# EAGLE board thermocouple-iron (EAGLE 5.07)
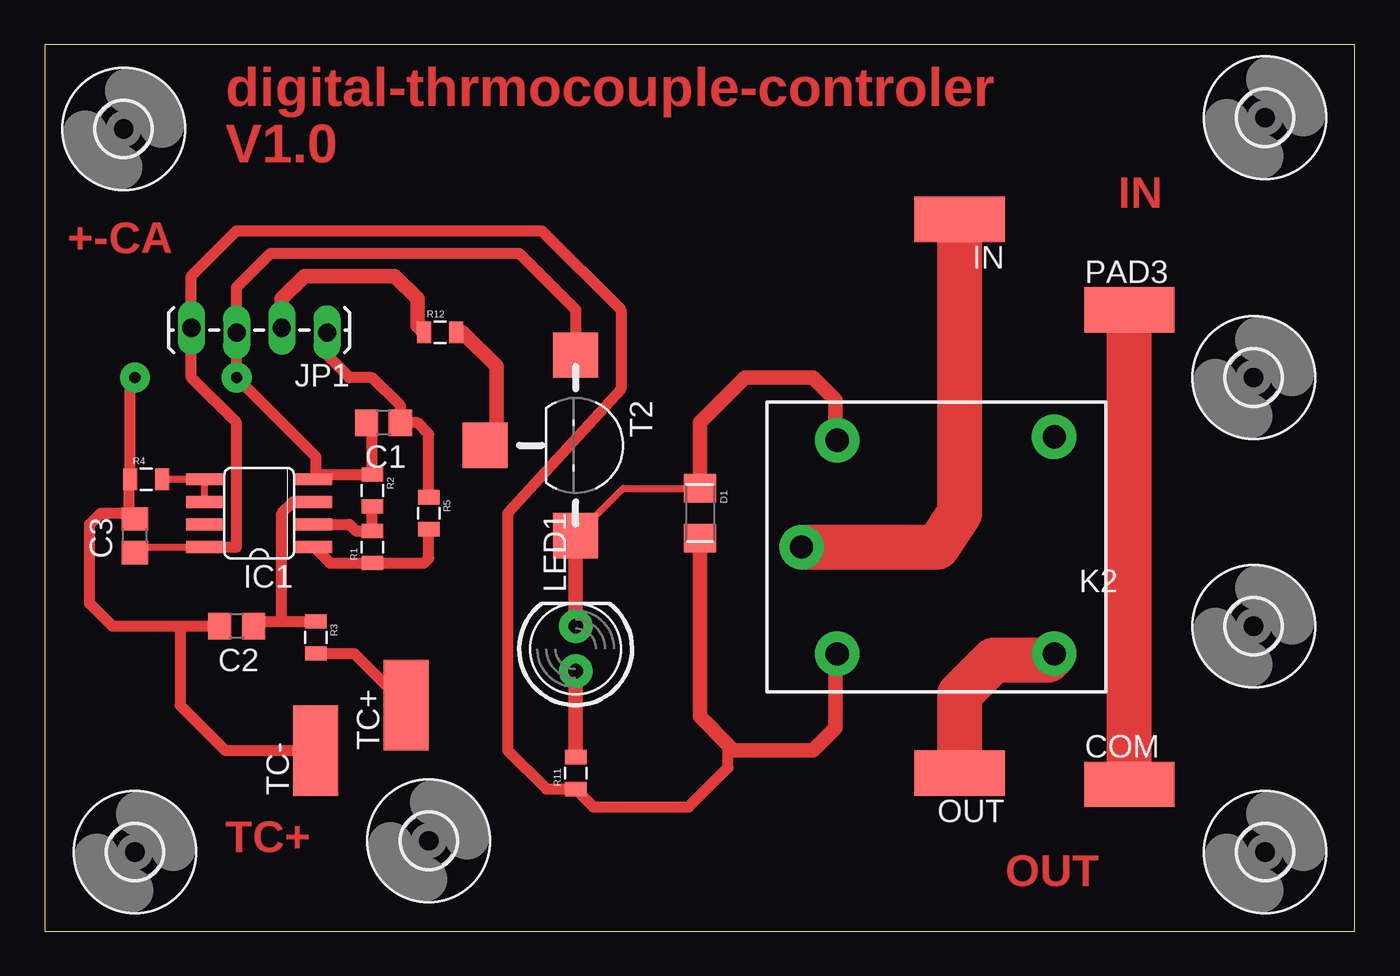
[diagram p0: board, top side]
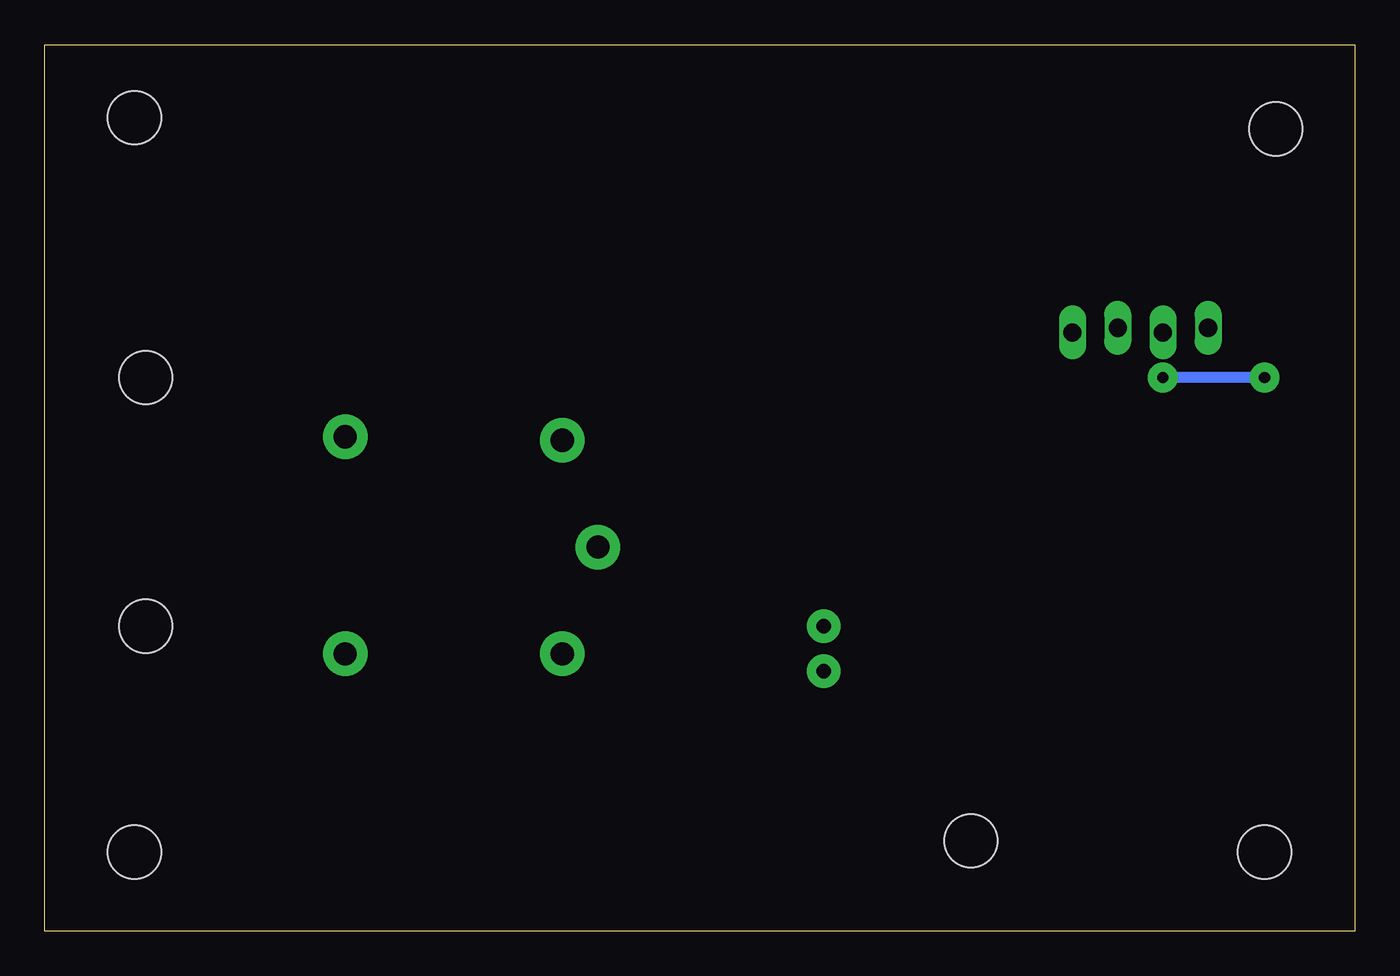
[diagram p1: board, bottom side, seen from below]

Size 73.64 x 49.84 mm. Coordinates in mm from the lower left corner, seen from the top.
Outline: 0,0 73.64,0 73.64,49.84 0,49.84 0,0
Copper layers (1*16): Top 0.035mm / dielectric 1.5mm / Bottom 0.035mm
Design rules "default": minimum track width 10mil, minimum drill 24mil, track to track 8mil, track to pad 8mil, pad to pad 8mil, via to via 8mil, smd to smd 8mil, copper to edge 40mil, drill to drill 8mil, minimum pad ring 10mil, minimum via ring 8mil, stop-mask expansion 4mil, vias tented up to drill 0mil, thermal gap 10mil

## Footprints (pad centres in the part's own frame; a part is rotated, then mirrored left to right if it is on the bottom)
C0805 = smd 1.3 x 1.5: 1 -0.95,0; 2 0.95,0
SMD2,54-5,08 = smd 2.54 x 5.08: 1 0,0
1206-DIODE = smd 1.6 x 1.8: A -1.4,0; K 1.4,0
3,0 = hole 3: 0,0
SO08 = smd 0.66 x 2.032: 1 -1.905,-3.073; 2 -0.635,-3.073; 3 0.635,-3.073; 4 1.905,-3.073; 5 1.905,3.073; 6 0.635,3.073; 7 -0.635,3.073; 8 -1.905,3.073
1X04_LOCK_LONGPADS = drill 1.016 long: 1 0,0; 2 2.54,-0.254; 3 5.08,0; 4 7.62,-0.254
SRD-05 = drill 1.3 pad 2.5 round: 11 17.145,8.255; 12 2.945,2.055; 14 2.945,14.255; A1 15.145,14.255; A2 15.145,2.255
LED5MM = drill 0.813 pad 1.88 round: A -1.27,0; K 1.27,0
0805 = smd 0.8 x 1.2: 1 -0.9,0; 2 0.9,0
TO92-EBC-SMD = smd 2.54 x 2.54: B 0,-5.08; C 5.08,0; E -5.08,0

## Placement (x,y rotation side)
C1  104  [C0805]  19.05,28.57 180 top
C2  104  [C0805]  10.79,17.14 180 top
C3  474  [C0805]  5.08,22.23 90 top
COM  [SMD2,54-5,08]  60.96,8.26 270 top
D1  IN4148  [1206-DIODE]  36.83,23.5 270 top
H1  MOUNT-HOLE3.0  [3,0]  68.58,45.72 0 top
H2  MOUNT-HOLE3.0  [3,0]  68.58,4.45 0 top
H3  MOUNT-HOLE3.0  [3,0]  4.45,45.09 0 top
H4  MOUNT-HOLE3.0  [3,0]  5.08,4.45 0 top
H5  MOUNT-HOLE3.0  [3,0]  67.94,31.11 0 top
H6  MOUNT-HOLE3.0  [3,0]  67.94,17.14 0 top
H7  MOUNT-HOLE3.0  [3,0]  21.59,5.08 0 top
IC1  LM358  [SO08]  12.06,23.5 90 top
IN  [SMD2,54-5,08]  51.44,40.01 90 top
JP1  [1X04_LOCK_LONGPADS]  15.88,33.66 180 top
K2  RELAY-ZNS5--SRD  [SRD-05]  59.69,29.84 180 top
LED1  RED  [LED5MM]  29.84,15.88 90 top
OUT  [SMD2,54-5,08]  51.44,8.89 90 top
PAD3  [SMD2,54-5,08]  60.96,34.92 270 top
R1  680k  [0805]  18.41,21.59 90 top
R2  10k  [0805]  18.41,24.77 270 top
R3  3.9k  [0805]  15.24,16.51 270 top
R4  10k  [0805]  5.71,25.4 0 top
R5  10k  [0805]  21.59,23.5 270 top
R11  470  [0805]  29.84,8.89 90 top
R12  10k  [0805]  22.23,33.66 0 top
T2  [TO92-EBC-SMD]  29.84,27.3 270 top
TC+  [SMD2,54-5,08]  20.32,12.7 0 top
TC-  [SMD2,54-5,08]  15.24,10.16 0 top

## Library data of the parts
C1-C3 D1 IC1 K2 R1-R5 R11 R12 T2 = digital-toy
COM IN OUT PAD3 TC+ TC- = wirepad
H1-H7 = holes
JP1 LED1 = SparkFun

## Nets
COM2: COM.1 PAD3.1
GND: C1.2 C2.2 C3.2 IC1.4 JP1.3 R2.1 R4.1 T2.E TC-.1
N$1: C2.1 IC1.3 R3.1
N$2: IC1.2 R1.2 R2.2
N$4: IC1.5 IC1.6 R4.2
N$5: R3.2 TC+.1
N$6: IC1.1 R1.1 R5.2
N$7: C1.1 JP1.1 R5.1
N$8: R12.2 T2.B
N$9: D1.A K2.A2 LED1.K T2.C
N$13: JP1.2 R12.1
N$15: IN.1 K2.11
N$16: K2.14 OUT.1
N$17: LED1.A R11.2
VCC: C3.1 D1.K IC1.8 JP1.4 K2.A1 R11.1

## Tracks (layer width: path | path; a pad name or v marks a point on that pad's centre or on a via)
COM2
  Top 2.54: COM.1 PAD3.1
GND  (via drill 0.64 pad 1.68)
  Top 0.406: 4.76,23.5 C3.2 | 4.76,25.34 R4.1 | 4.82,30.85 v5.08,31.11
  Top 0.61: 7.62,17.14 3.81,17.14 2.54,18.41 2.54,22.86 3.17,23.5 4.76,23.5 4.76,25.34 | 7.62,17.14 C2.2 | T2.E 29.84,34.92 26.67,38.1 12.7,38.1 10.79,36.2 JP1.3 v10.79,31.11 15.24,26.67 15.24,25.5 IC1.4 15.4,25.66 R2.1 18.41,28.26 C1.2 | R4.1 4.82,30.85 | TC-.1 10.16,10.16 7.62,12.7 7.62,17.14
  Bottom 0.61: v5.08,31.11 v10.79,31.11
N$1
  Top 0.406: C2.1 12.01,17.41
  Top 0.61: 12.01,17.41 13.34,17.41 | 13.34,17.41 R3.1 | IC1.3 13.97,24.13 13.34,23.5 13.34,17.41
N$2
  Top 0.61: R2.2 R1.2 17.52,22.49 17.14,22.86 IC1.2
N$4
  Top 0.406: R4.2 IC1.5 IC1.6
N$5
  Top 0.61: R3.2 17.41,15.61 TC+.1
N$6
  Top 0.61: IC1.1 16.04,20.69 R1.1 21.32,20.69 21.59,20.95 R5.2
N$7
  Top 0.61: R5.1 21.59,27.94 20.95,28.57 C1.1 20,29.53 18.41,31.11 17.14,31.11 15.88,32.38 JP1.1
N$8
  Top 0.813: R12.2 23.5,33.66 25.4,31.75 25.4,26.67 T2.B
N$9
  Top 0.406: T2.C 32.52,24.89 D1.A
  Top 0.813: D1.A 36.83,28.57 39.37,31.11 43.18,31.11 44.45,29.84 44.45,27.68 K2.A2 | LED1.K T2.C
N$13
  Top 0.813: JP1.2 13.34,35.56 14.61,36.83 19.68,36.83 20.95,35.56 20.95,34.02 R12.1
N$15
  Top 2.54: K2.11 50.16,21.59 51.44,23.5 IN.1
N$16
  Top 2.54: OUT.1 51.44,13.34 53.34,15.24 56.4,15.24 K2.14
N$17
  Top 0.813: R11.2 LED1.A
VCC
  Top 0.406: IC1.8 5.39,21.59 C3.1
  Top 0.61: IC1.8 10.79,21.59 10.79,28.57 8.26,31.11 JP1.4 8.26,36.83 10.79,39.37 27.94,39.37 32.38,34.92 32.38,30.48 26.04,23.5 26.04,10.16 28.2,7.99 R11.1 30.85,6.99 36.2,6.99 38.42,9.21 38.42,10.48
  Top 0.813: D1.K 36.83,12.06 38.42,10.48 38.73,10.16 43.18,10.16 44.45,11.43 44.45,15.49 K2.A1

## Text on the board
Top: digital-thrmocouple-controler | V1.0 | IN | +-CA | TC+ | OUT